# Altium PCB PIPOCPUD_2006.PCBDOC (part 2 of 10)
Units mm, origin at the board's own origin, x right, y up, seen from the top; angles counter-clockwise.
Board outline 179.96 x 114.94 mm, 2 copper layers (Top Layer, Top, Bottom Layer, Bottom), stack 1.341 mm thick; 247 components, 222 nets, 910 pads, 491 vias.
Unrouted connection lines stored in the file: 2.
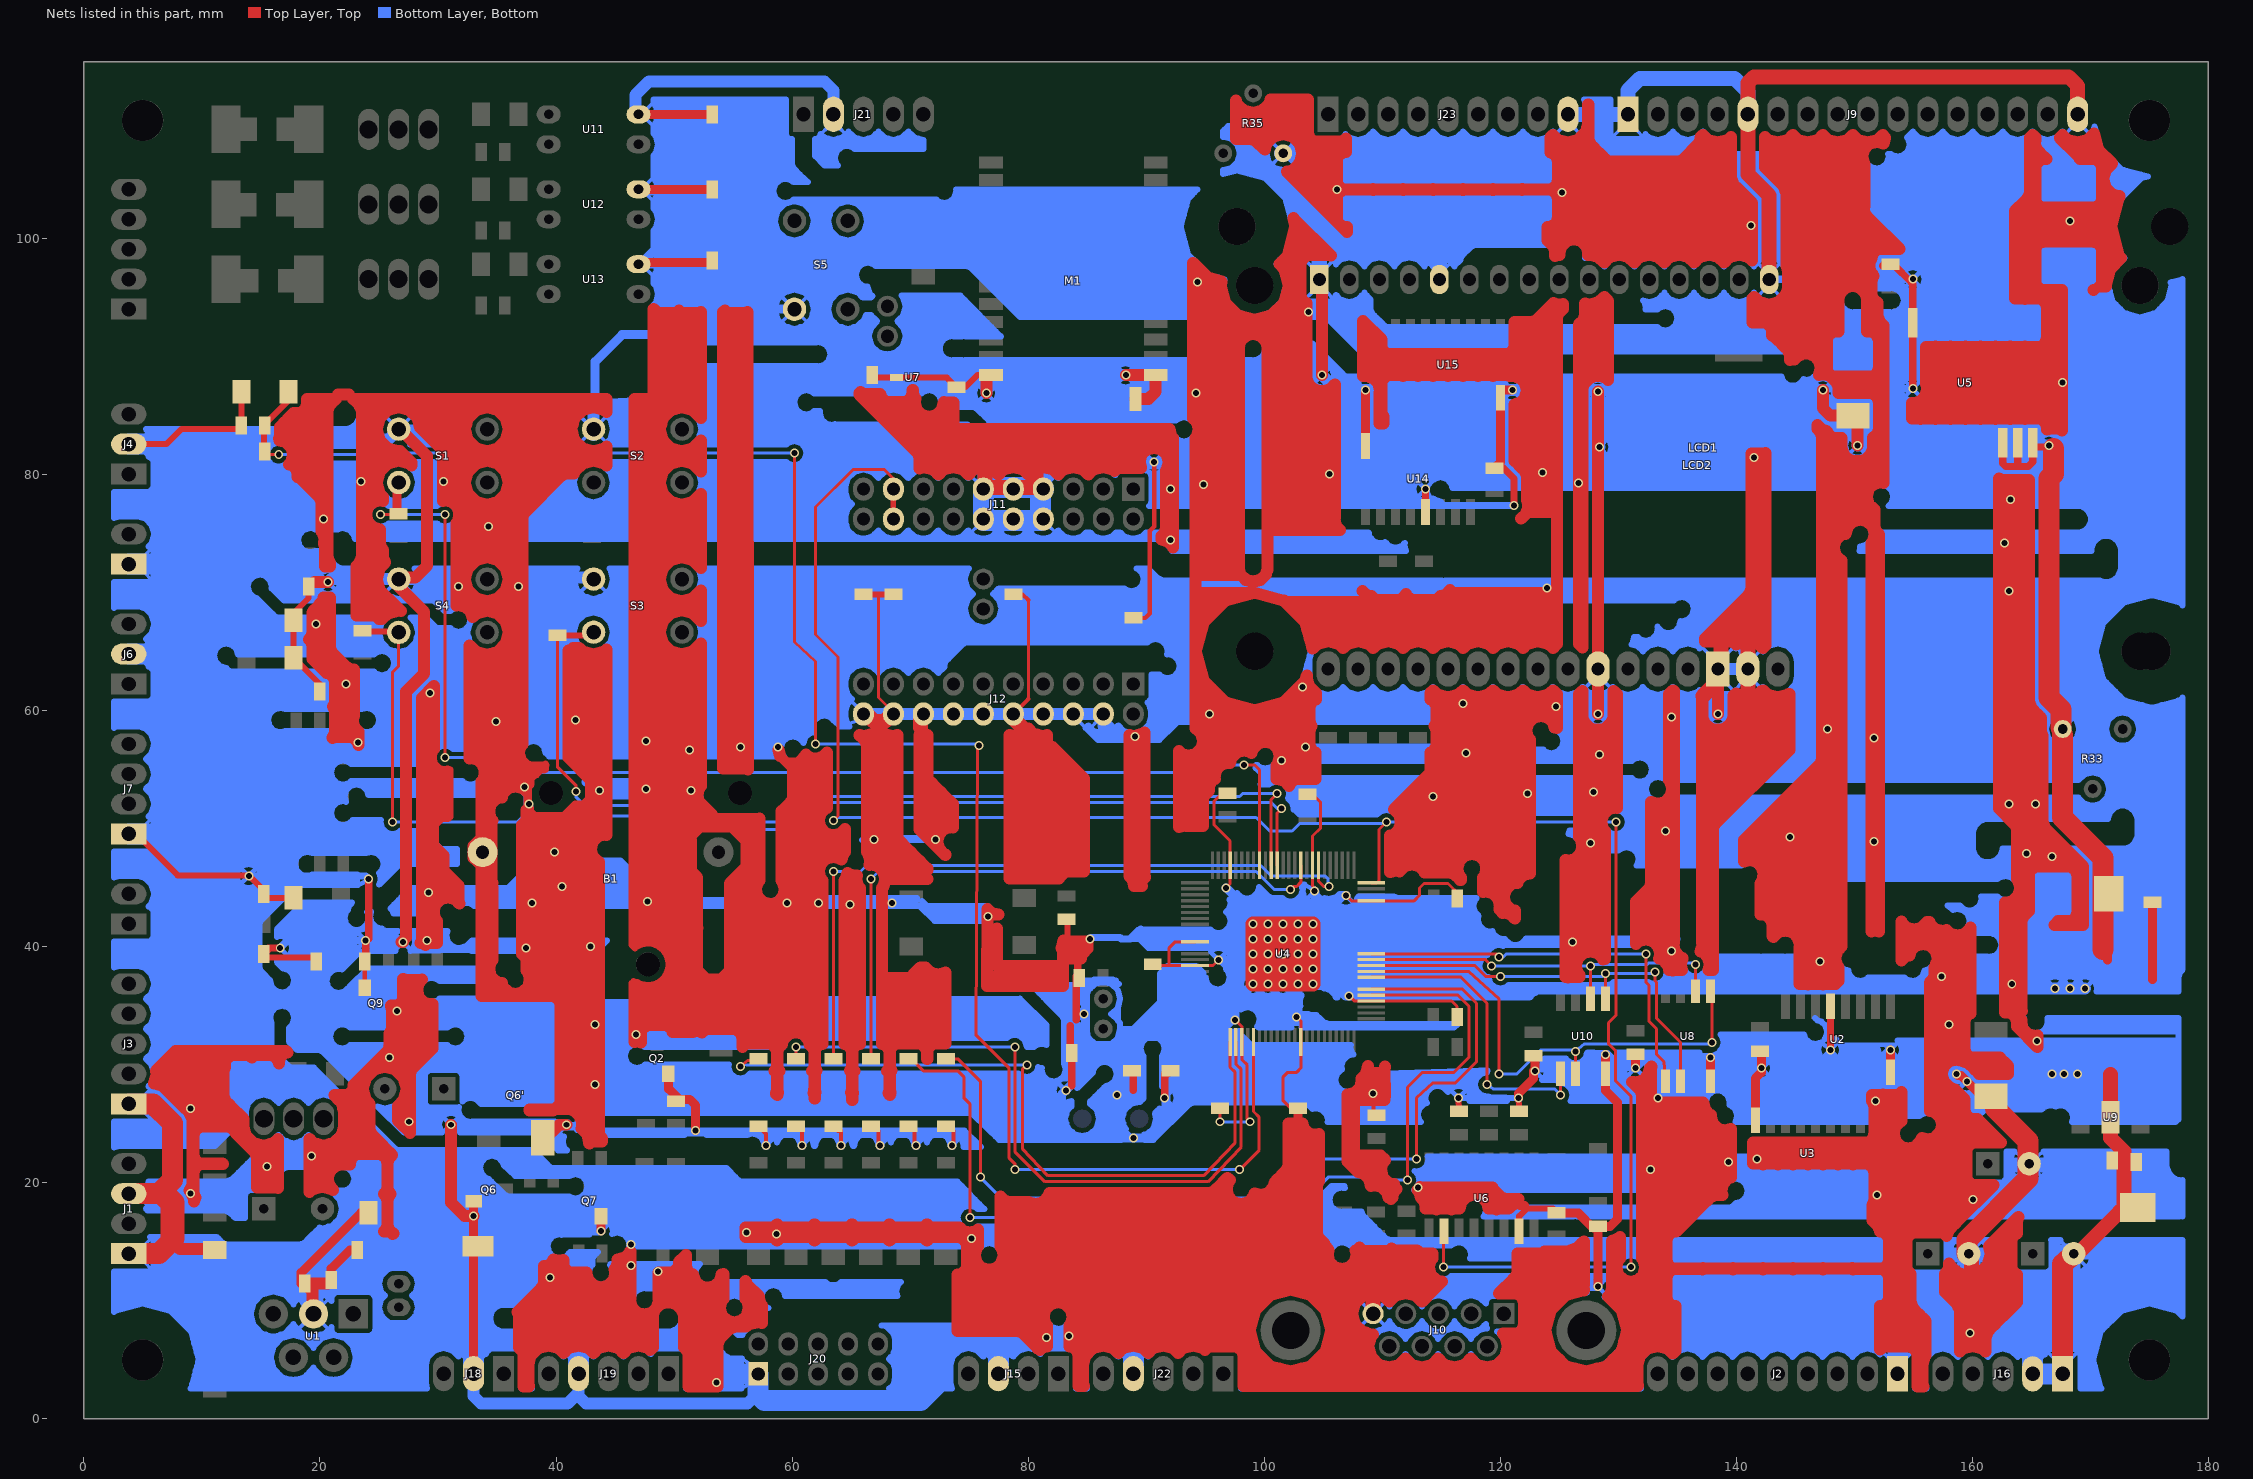
[diagram p2: the nets of this part, all layers, seen from the top]

## Via types
v1: diameter 0.762, hole 0.508, Top Layer, Top to Bottom Layer, Bottom, 489 vias
v2: diameter 0.864, hole 0.813, Top Layer, Top to Bottom Layer, Bottom, 2 vias

## Nets (pads, with @x,y where several pads share a name; then routed paths per layer and width w, separated by ;. In a path a pad name is that pad's centre, name@x,y a point inside that pad or via, vN(x,y) a via of type N, cw(c..) or ccw(c..) an arc to the next point about the centre after c; other vN are vias at no path point) (continued)
CEL_TXD: J11.17 J11.18 U4.75 U6.10 | length 172.5
  Top Layer, Top w0.254: v1(63.5,50.673) 63.881,51.054 63.881,64.516 61.976,66.421 61.976,77.216 65.151,80.391 67.818,80.391 68.58,79.629 68.58,76.454 J11.18@68.58,76.2 ; U4.75@109.068,45.39 109.525,45.39 109.728,45.593 109.728,49.911 v1(110.363,50.546) ; v1(115.189,12.827) 115.189,14.859 U6.10@115.24,15.875 ; v1(129.794,50.546) 129.794,34.163 129.159,33.528 129.159,31.75 129.769,31.14 129.769,28.6 131.064,27.305 v1(131.064,12.827)
  Top Layer, Top w0.457: J11.18@68.58,76.2 68.58,77.978 J11.17@68.58,78.74
  Bottom Layer, Bottom w0.254: v1(63.5,50.673) 63.754,50.927 99.314,50.927 100.457,49.784 102.362,49.784 102.997,50.419 110.236,50.419 v1(110.363,50.546) v1(129.794,50.546) ; v1(115.189,12.827) v1(131.064,12.827)
CH1: R95.1 U4.82 | length 61.4
  Top Layer, Top w0.254: R95.1@63.5,30.48 v1(63.5,46.355) ; U4.82@104.597,46.863 104.597,45.517 105.029,45.085 v1@105.41,45.085
  Bottom Layer, Bottom w0.254: v1(63.5,46.355) 65.786,46.355 66.294,46.863 99.695,46.863 100.584,45.974 105.156,45.974 105.41,45.72 v1@105.41,45.085
  other v1: 105.486,45.06
CH2: R92.1 U4.85 | length 54.5
  Top Layer, Top w0.254: R92.1@66.675,30.48 v1(66.675,45.72) ; v1(102.235,44.831) 102.489,45.085 102.743,45.085 103.099,45.441 U4.85@103.099,46.863
  Bottom Layer, Bottom w0.254: v1@66.929,45.847 v1(66.675,45.72) 67.31,46.355 86.487,46.355 99.314,46.355 100.838,44.831 v1(102.235,44.831)
CH3: R94.1 U4.57 | length 76.8
  Top Layer, Top w0.254: R94.1@73.025,30.48 74.041,30.48 75.946,28.575 v1(75.946,20.447) ; U4.57@109.068,36.373 116.789,36.373 117.983,35.179 117.983,30.226 116.205,28.448 114.3,28.448 112.903,27.178 112.903,22.225 v1(112.903,21.971)
  Bottom Layer, Bottom w0.254: v1(75.946,20.447) 77.724,18.669 101.092,18.669 104.394,21.971 v1(112.903,21.971)
CH4: R93.1 U4.56 | length 83.2
  Top Layer, Top w0.254: R93.1@69.85,30.48 70.104,30.48 71.12,29.464 74.041,29.464 74.549,28.956 74.549,27.178 75.057,26.67 v1(75.057,17.018) ; U4.56@109.068,35.865 116.408,35.865 117.348,34.925 117.348,30.607 116.078,29.337 113.411,29.337 112.141,28.067 v1(112.141,20.193)
  Bottom Layer, Bottom w0.254: v1(75.057,17.018) 101.981,17.018 105.41,20.447 110.49,20.447 110.744,20.193 v1(112.141,20.193)
CH5: R96.1 U4.29 | length 62.2
  Top Layer, Top w0.254: v1(55.626,29.845) 56.261,30.353 56.896,30.353 57.023,30.48 R96.1@57.15,30.48 ; v1(79.883,29.972) 79.502,29.591 79.502,22.86 81.661,20.574 94.869,20.574 97.536,23.368 97.536,29.337 97.104,29.769 U4.29@97.104,31.902
  Bottom Layer, Bottom w0.254: v1(55.626,29.845) 56.134,29.972 v1(79.883,29.972)
CH6: R91.1 U4.30 | length 59
  Top Layer, Top w0.254: R91.1@60.325,30.48 v1(60.325,31.496) ; v1(78.867,31.496) 78.867,22.606 81.407,20.066 95.25,20.066 98.044,22.987 98.044,29.591 97.587,30.048 U4.30@97.587,31.902
  Bottom Layer, Bottom w0.254: v1(60.325,31.496) v1(78.867,31.496)
DEC: R27.2 S3.2 U4.90 | length 85.3
  Top Layer, Top w0.254: R27.2@40.132,66.345 40.107,55.22 41.707,53.619 v1(41.707,53.137) ; S3.2@43.002,66.345 S3.2@43.18,66.624 ; U4.90@100.584,46.863 100.584,52.451 v1(101.092,52.959)
  Top Layer, Top w0.508: R27.2@40.132,66.345 S3.2@43.002,66.345
  Bottom Layer, Bottom w0.254: v1@41.707,53.315 41.707,52.629 42.393,51.943 44.298,51.943 46.863,51.943 48.26,50.546 60.071,50.546 62.23,52.705 66.675,52.705 97.917,52.705 98.171,52.959 v1(101.092,52.959)
ENTER: R28.2 S4.2 U4.89 | length 101.6
  Top Layer, Top w0.254: v1(26.162,50.546) 26.162,63.246 26.67,63.754 26.67,66.802 S4.2@26.67,66.599 ; U4.89@101.092,46.863 101.092,51.308 v1(101.473,51.689)
  Top Layer, Top w0.508: R28.2@23.749,66.675 S4.2@26.543,66.675
  Bottom Layer, Bottom w0.254: v1(26.162,50.546) 36.703,50.546 37.211,51.054 41.656,51.054 46.736,51.054 47.879,49.911 60.325,49.911 62.611,52.197 100.584,52.197 101.092,51.689 v1(101.473,51.689)
ESC: R25.2 S1.2 U4.92 | length 107.8
  Top Layer, Top w0.254: v1(25.146,76.581) 26.67,76.581 R25.2@26.67,76.657 ; v1(30.607,56.007) v1(30.607,76.581) ; v1(98.298,55.372) 99.187,55.372 99.593,54.966 U4.92@99.593,46.863
  Top Layer, Top w0.762: R25.2@26.543,76.708 S1.2@26.543,78.867
  Bottom Layer, Bottom w0.254: v1(25.146,76.581) v1(30.607,76.581) ; v1(30.607,56.007) 35.306,56.007 36.576,54.737 95.885,54.737 96.52,55.372 v1(98.298,55.372)
FIM_DO_PAPEL: C20.2 D2.2 R15.2 U4.33 | length 158.3
  Top Layer, Top w0.254: R15.2@15.316,81.915 15.367,81.661 v1(16.51,81.661) ; v1(60.198,81.788) 60.198,65.786 61.976,64.135 v1(61.976,57.15) ; v1(75.819,57.023) 75.819,56.896 75.692,56.769 75.565,32.512 78.359,29.718 78.359,22.098 78.867,21.59 v1(78.867,21.082) ; v1(97.917,21.082) 99.568,22.733 99.568,25.527 99.085,26.01 U4.33@99.085,31.902
  Top Layer, Top w0.508: R15.2@15.24,81.585 15.24,84.15 D2.2@17.45,86.36
  Bottom Layer, Bottom w0.254: v1(16.51,81.661) 26.035,81.661 26.162,81.788 v1(60.198,81.788) ; v1(61.976,57.15) 75.692,57.15 v1(75.819,57.023) ; v1(78.867,21.082) v1(97.917,21.082)
FLASH_CE: U4.63 U8.1 | length 34.9
  Top Layer, Top w0.254: U4.63@109.068,39.37 119.634,39.37 v1(119.888,39.116) ; v1(132.334,39.37) 132.334,36.957 132.588,36.703 132.588,33.655 133.223,33.02 133.223,30.861 133.858,30.226 U8.1@133.985,28.575
  Bottom Layer, Bottom w0.254: v1(119.888,39.116) 120.269,39.116 120.523,39.37 v1(132.334,39.37)
FLASH_SCK: U4.62 U8.6 U10.6 | length 33
  Top Layer, Top w0.254: U4.62@109.068,38.887 118.72,38.887 v1(119.253,38.354) ; U10.6@127.635,35.56 v1(127.635,38.354) ; U8.6@136.525,36.195 136.525,36.703 v1(136.525,38.481)
  Bottom Layer, Bottom w0.254: v1(119.253,38.354) v1(127.635,38.354) 127.889,38.354 128.016,38.481 132.461,38.481 132.588,38.608 v1@136.525,38.608 ; v1@136.525,38.354 v1(136.525,38.481)
FLASH_SI: U4.60 U8.5 U10.2 | length 43.2
  Top Layer, Top w0.254: U4.60@109.068,37.871 117.323,37.871 117.348,37.846 119.888,35.56 v1(119.888,29.21) ; U10.2@126.365,29.21 v1(126.365,31.115) ; v1(137.922,31.877) U8.5@137.922,35.814
  Bottom Layer, Bottom w0.254: v1(119.888,29.21) 121.412,29.21 123.444,31.242 126.365,31.242 v1(126.365,31.115) 127.127,31.75 137.795,31.75 v1(137.922,31.877)
FLASH_SO: U4.61 U8.2 U10.5 | length 36.9
  Top Layer, Top w0.254: U4.61@109.068,38.379 117.831,38.379 118.745,37.465 v1(120.015,37.465) ; U10.5@128.905,35.56 v1(128.905,37.719) ; v1(133.096,37.846) 133.096,37.084 133.223,36.957 133.223,33.909 135.255,31.877 U8.2@135.255,28.575
  Bottom Layer, Bottom w0.254: v1(120.015,37.465) 128.651,37.465 v1(128.905,37.719) 132.969,37.719 v1(133.096,37.846)
FRAM_CS: U4.59 U10.1 | length 25.9
  Top Layer, Top w0.254: U4.59@109.068,37.389 116.662,37.389 118.872,35.179 v1(118.872,28.321) ; v1(125.095,27.432) U10.1@125.095,29.21
  Bottom Layer, Bottom w0.254: v1(118.872,28.321) 119.38,27.94 124.587,27.94 v1(125.095,27.432)
GND: B1.2 C5.1 C7.1 C8.1 C9.1 C10.1 C11.1 C12.1 C13.1 C14.1 C15.1 C16.1 C17.1 C18.1 C19.1 C20.1 C21.1 C22.1 C23.1 C24.2 C25.2 C27.1 C29.1 C30.1 C31.1 C32.1 C33.1 C34.1 C35.1 C36.1 C37.2 C38.2 C39.1 C40.2 C41.1 C42.1 C43.1 C44.1 C45.1 C46.1 C47.1 C48.1 C49.1 C50.1 D2.1 D4.1 D5.1 D6.1 D7.1 D11.1 D12.1 J1.1 J1.3 J2.1 J3.1 J4.2 J5.1 J6.2 J7.1 J9.1 J9.5 J9.16 J10.5 J11.7 J11.8 J11.9 J11.10 J11.11 J11.12 J12.4 J12.6 J12.8 J12.10 J12.12 J12.14 J12.16 J12.18 J12.20 J15.3 J16.1 J16.2 J18.2 J19.4 J20.1 J21.2 J22.4 J23.9 L1.2 L2.2 L3.2 L4.2 L5.2 LCD1.1 LCD1.5 LCD1.16 LCD2.1 LCD2.5 LCD2.16 M1.13 M1.21 M1.22 Q2.2 Q6'.3 Q6.2 Q7.2 Q9.2 R3.1 R5.2 R6.2 R24.1 R33.3 R35.3 R49.2 R50.2 R51.2 R52.2 R61.2 R83.1 S1.1 S2.1 S3.1 S4.1 S5.1 U1.3 U2.8 U2.13 U3.8 U4.11 U4.15 U4.31 U4.41 U4.55 U4.72 U4.83 U4.97 U5.8 U5.9 U5.10 U5.19 U6.15 U7.2 U8.4 U9.2 U10.4 U11.2 U12.2 U13.2 U14.8 U14.13 U15.8 | length 41066.6
  Top Layer, Top w0.254: 51.562,37.592 53.848,37.592 54.356,38.1 54.356,39.751 ; 52.324,49.784 54.737,49.784 56.007,48.514 56.007,48.768 54.737,50.038 ; 67.31,69.723 67.31,61.087 J12.18@68.58,59.817 ; 80.01,60.96 80.01,69.342 ; C12.1@90.703,38.379 91.923,38.379 ; U4.11@94.132,40.386 92.456,40.386 91.948,39.878 91.923,39.726 91.923,38.379 ; v1(96.139,38.862) 95.656,38.379 U4.15@94.132,38.379 91.923,38.379 ; v1(96.266,25.146) 96.266,26.035 C13.1@96.266,26.289 ; v1(96.774,44.958) 97.104,45.288 U4.97@97.104,46.863 97.104,48.946 95.758,50.292 95.758,52.324 96.393,52.959 C18.1@96.901,52.959 ; v1(97.536,33.782) 98.095,33.223 U4.31@98.095,31.902 98.095,30.429 98.552,29.972 98.552,25.4 v1(98.806,25.146) ; v1(102.743,34.036) 103.099,33.68 U4.41@103.099,31.902 103.099,29.693 102.743,29.337 101.981,29.337 101.6,28.956 101.6,26.924 102.108,26.416 C14.1@102.87,26.289 ; C17.1@103.657,52.883 104.14,52.832 104.775,52.197 104.775,50.038 104.089,49.352 U4.83@104.089,46.863 104.089,45.136 104.394,44.831 104.394,44.704 104.369,44.679 v1(104.267,44.679) ; v1(106.934,44.323) 107.391,43.866 U4.72@109.068,43.866 112.7,43.866 113.157,44.323 113.157,44.958 113.538,45.339 115.57,45.339 116.586,44.323 C16.1@116.332,44.069 ; v1(107.188,35.814) 107.569,35.433 ; 107.62,35.382 U4.55@109.068,35.382 115.875,35.382 116.332,34.925 116.332,34.29 C15.1@116.332,34.036
  Top Layer, Top w0.356: Q9.2@23.8,36.195 Q9.2@23.8,36.5 23.8,38.1 R83.1@23.8,38.735 ; C45.1@57.15,24.765 57.277,24.638 57.785,24.13 v1(57.785,23.114) ; C33.1@60.325,24.765 60.706,24.765 60.833,24.638 v1(60.833,23.114) ; v1(64.135,23.114) 64.135,24.384 C44.1@64.008,24.384 ; C36.1@66.675,24.765 66.929,24.765 67.056,24.638 67.31,24.384 67.31,23.114 v1(67.437,23.114) ; R50.2@68.326,69.723 67.31,69.723 66.294,69.723 R50.2@68.58,69.825 ; J12.18@68.58,59.69 J12.18@68.58,59.817 ; C42.1@69.85,24.765 70.231,24.765 70.358,24.638 70.358,23.114 v1(70.485,23.114) ; C43.1@73.025,24.765 73.279,24.765 73.406,24.638 73.66,24.384 73.66,23.114 v1(73.533,23.114) ; J12.10@78.74,59.69 78.867,59.817 80.01,60.96 ; R51.2@78.74,69.825 79.527,69.825 80.01,69.342 ; R52.2@88.9,67.843 88.9,67.818 89.916,67.818 90.297,68.199 90.297,75.184 90.678,75.565 v1(90.678,81.026) ; C49.1@109.245,25.705 109.245,26.924 ; U3.8@141.605,25.273 141.605,28.829 ; C44.1@64.008,24.384 63.5,24.892 C44.1@63.5,24.765 63.881,24.384 C44.1@64.008,24.384
  Top Layer, Top w0.457: R49.2@66.04,69.825 68.047,69.825 R50.2@68.58,69.825
  Top Layer, Top w0.508: J7.1@3.81,49.53 4.445,49.53 7.95,46.025 13.97,46.025 15.24,44.755 R24.1@15.24,44.45 15.24,44.12 17.45,44.12 D11.1@17.78,44.12 ; J4.2@3.81,82.55 6.985,82.55 8.255,83.82 13.335,83.82 C20.1@13.335,84.125 13.335,86.665 D2.1@13.335,86.995 ; C22.1@15.24,39.37 15.24,39.04 19.685,39.04 C32.1@19.685,38.735 ; C19.1@19.05,70.485 19.05,69.52 17.78,68.25 D6.1@17.78,67.615 17.78,67.285 D7.1@17.78,64.44 19.99,62.23 C21.1@19.99,61.595 ; 31.064,54.991 31.064,53.238 31.064,50.978 ; 32.004,43.561 32.004,45.212 30.734,46.482 30.734,47.752 29.845,48.641 29.845,50.292 30.353,50.8 30.861,50.8 30.861,51.054 30.988,51.181 30.988,50.927 30.988,51.486 31.064,51.562 31.064,50.978 ; 46.406,36.068 46.406,36.881 46.584,37.059 46.584,36.805 46.736,36.652 48.793,36.652 49.809,37.668 49.809,39.268 48.717,40.361 49.276,40.361 49.53,40.107 49.53,39.751 50.317,38.964 50.317,37.313 49.581,36.576 49.581,36.906 49.987,37.313 49.911,37.313 49.174,36.576 ; 46.431,40.945 46.406,40.945 46.406,40.107 46.66,39.853 46.66,40.183 46.761,40.284 ; 46.674,39.843 cw(c47.777,38.481) 46.849,36.995 ; C34.1@66.802,88.392 66.802,88.24 66.853,88.189 U7.2@68.834,88.189 73.101,88.189 C46.1@73.914,87.376 74.676,87.376 75.692,88.392 76.784,88.392 77.216,88.392 77.191,88.417 M1.13@76.86,88.417 ; 83.312,40.259 C50.1@83.312,42.291 ; v1(116.459,27.178) C30.1@116.51,26.035 ; v1(121.539,27.178) 121.59,26.34 C29.1@121.59,26.035 ; U6.15@121.59,15.875 121.59,16.51 121.59,17.145 122.225,17.78 124.46,17.78 124.46,17.755 C27.1@124.765,17.45 ; 31.064,50.978 30.861,50.775 31.064,50.978
  Top Layer, Top w0.61: C22.1@15.24,39.37 15.621,39.751 15.621,39.878 v1(16.637,39.878) ; R83.1@23.8,38.735 23.8,39.04 23.876,39.116 v1(23.876,40.513) 24.003,40.64 24.13,40.64 v1(24.13,45.72) ; 36.932,53.391 37.414,52.908 37.567,52.908 37.592,52.883 37.592,53.467 37.871,53.746 37.871,54.204 38.176,54.508 38.278,54.508 38.43,54.661 ; 37.617,55.347 39.141,55.347 39.116,55.321 ; 37.668,51.587 37.668,53.365 37.567,53.264 37.567,52.883 37.567,51.791 v1@37.719,51.791 ; v1@37.668,52.045 37.668,51.638 38.227,51.079 40.64,51.079 41.631,52.07 42.291,52.07 42.748,52.527 42.748,54 40.919,55.829 40.919,55.855 40.843,55.931 40.843,59.03 ; 37.922,54.788 38.557,54.788 ; 38.024,54.94 39.014,54.94 ; 38.557,55.042 38.608,55.093 ; 39.116,54.991 39.116,55.448 ; 41.097,51.054 41.25,51.054 41.58,51.384 ; 42.545,55.042 42.545,54.712 43.053,54.204 43.053,52.248 42.164,51.359 42.85,51.359 43.561,52.07 43.561,54.737 43.231,54.737 43.18,54.737 43.18,53.67 ; 83.439,40.64 v1(85.217,40.64) 85.217,39.751 84.201,38.735 84.201,37.338 84.074,37.465 84.074,33.782 ; 83.566,33.274 83.566,30.861 C10.1@83.693,30.988 83.693,28.194 ; C9.1@88.773,29.464 88.9,29.337 88.9,29.21 88.9,27.813 ; v1(91.567,27.178) 91.567,29.21 91.821,29.21 C8.1@92.075,29.464 ; U14.13@113.665,76.81 113.665,77.089 v1(113.665,78.74) ; C47.1@119.507,80.518 120.269,80.518 121.158,79.629 v1(121.158,77.343) ; v1(147.955,31.242) 147.955,31.623 147.955,34.544 U2.13@147.955,34.925 ; C23.1@153.035,97.79 152.527,97.79 152.4,97.663 153.416,97.663 v1@154.737,96.317 ; v1(154.94,87.249) U5.19@154.94,92.837 154.94,93.599 154.94,96.139 v1@154.737,96.317 ; v1(154.94,96.52) v1@154.737,96.317 ; U5.8@162.56,82.677 162.56,82.296 162.56,80.899 162.814,80.645 163.83,80.645 ; U5.9@163.83,82.677 163.83,82.042 163.83,80.645 ; v1(166.497,82.423) 166.624,82.296 165.1,82.296 165.1,81.026 164.719,80.645 163.83,80.645
  Top Layer, Top w0.762: C48.1@18.72,11.43 18.415,11.43 18.415,12.37 23.495,17.45 23.8,17.45 R5.2@24.13,17.45 ; C5.1@20.955,11.735 20.955,11.76 20.955,12.7 22.53,14.275 22.86,14.275 R3.1@23.165,14.275 ; J18.2@33.02,3.81 v1(33.02,17.145) Q6.2@33.02,18.415 ; v1(43.815,15.875) Q7.2@43.815,17.145 ; U13.2@46.99,97.79 46.736,97.79 46.609,97.917 53.086,97.917 53.086,97.942 L5.2@53.238,98.095 ; U12.2@46.99,104.14 47.117,104.14 L4.2@53.238,104.14 ; U11.2@46.99,110.49 47.244,110.49 L3.2@53.238,110.49 ; Q2.2@49.505,29.21 49.53,29.21 49.53,27.94 50.419,27.051 51.308,27.051 51.816,26.543 v1(51.816,24.384) ; 52.07,52.197 52.324,52.197 53.34,51.181 ; 52.324,50.927 57.277,50.927 ; 59.182,45.339 59.157,45.339 59.157,45.364 58.953,45.568 58.953,51.46 59.792,52.299 ; 59.817,55.245 58.928,56.134 59.055,56.134 59.563,55.626 60.325,55.626 59.944,55.245 59.944,55.118 59.944,51.689 ; 60.198,55.245 62.103,55.245 62.23,55.372 62.23,52.07 60.452,52.07 60.452,53.975 62.103,53.975 62.103,53.213 61.341,52.451 60.96,52.451 60.96,53.213 60.706,53.467 61.595,53.467 61.595,53.34 61.214,52.959 ; v1@101.6,41.656 v1(101.6,41.91) ; 102.87,25.146 C14.1@102.87,25.908 ; v1(102.87,36.83) v1@102.87,37.084 ; v1@102.87,41.656 v1(102.87,41.91) ; 107.747,22.123 107.747,26.975 ; 107.747,22.428 109.88,22.428 110.312,21.996 ; U14.8@108.585,82.169 U14.8@108.585,82.398 v1(108.585,87.122) ; C47.1@119.507,80.518 119.761,80.772 120.015,81.026 120.015,86.233 U15.8@120.015,86.487 120.015,86.614 120.015,86.995 120.142,87.122 v1(121.031,87.122) ; 121.412,18.288 121.666,18.034 122.047,18.034 ; v1(121.539,27.178) 121.539,27.559 122.809,28.829 122.809,29.464 v1(122.936,29.464) 122.936,30.353 122.809,30.48 C31.1@122.809,30.734 ; C27.1@124.765,17.45 125.044,17.45 125.095,17.399 126.619,17.399 127.889,16.129 L1.2@128.27,16.129 ; v1(128.27,11.176) 128.27,16.002 L1.2@128.27,16.129 ; v1@128.27,82.296 v1(128.397,82.296) ; v1(128.905,30.861) 128.905,29.337 U10.4@128.905,29.21 128.905,27.813 129.921,26.797 129.921,16.891 129.286,16.256 128.524,16.256 128.499,16.281 L1.2@128.27,16.281 L1.2@128.27,16.129 ; v1(131.445,29.718) 131.445,30.607 C35.1@131.445,30.861 ; U8.4@137.795,28.575 137.795,28.829 v1(137.795,30.607) ; U3.8@141.605,25.273 141.605,25.908 141.605,28.829 142.113,29.337 v1(142.113,29.718) 142.113,31.115 C7.1@141.986,31.115 ; U2.8@153.035,29.337 153.035,30.099 v1(153.035,31.242) ; v1(158.623,29.21) 158.75,29.083 159.004,29.083 v1(159.512,28.575) 160.655,27.432 160.782,27.305 C25.2@161.544,27.305 ; 171.45,38.862 171.45,44.196 171.526,44.272 D5.1@171.526,44.45 ; 175.26,37.211 175.26,43.434 L2.2@175.26,43.739
  Top Layer, Top w0.965: C5.1@20.625,11.43 20.65,11.43 C5.1@20.955,11.735